# Altium PCB FE.PcbDoc
Units mm, origin at the board's own origin, x right, y up, seen from the top; angles counter-clockwise.
Board outline 43.2 x 52 mm, 4 copper layers (Layer 1, Layer 2, Layer 3, Layer 4), stack 1.641 mm thick; 122 components, 70 nets, 348 pads, 257 vias.
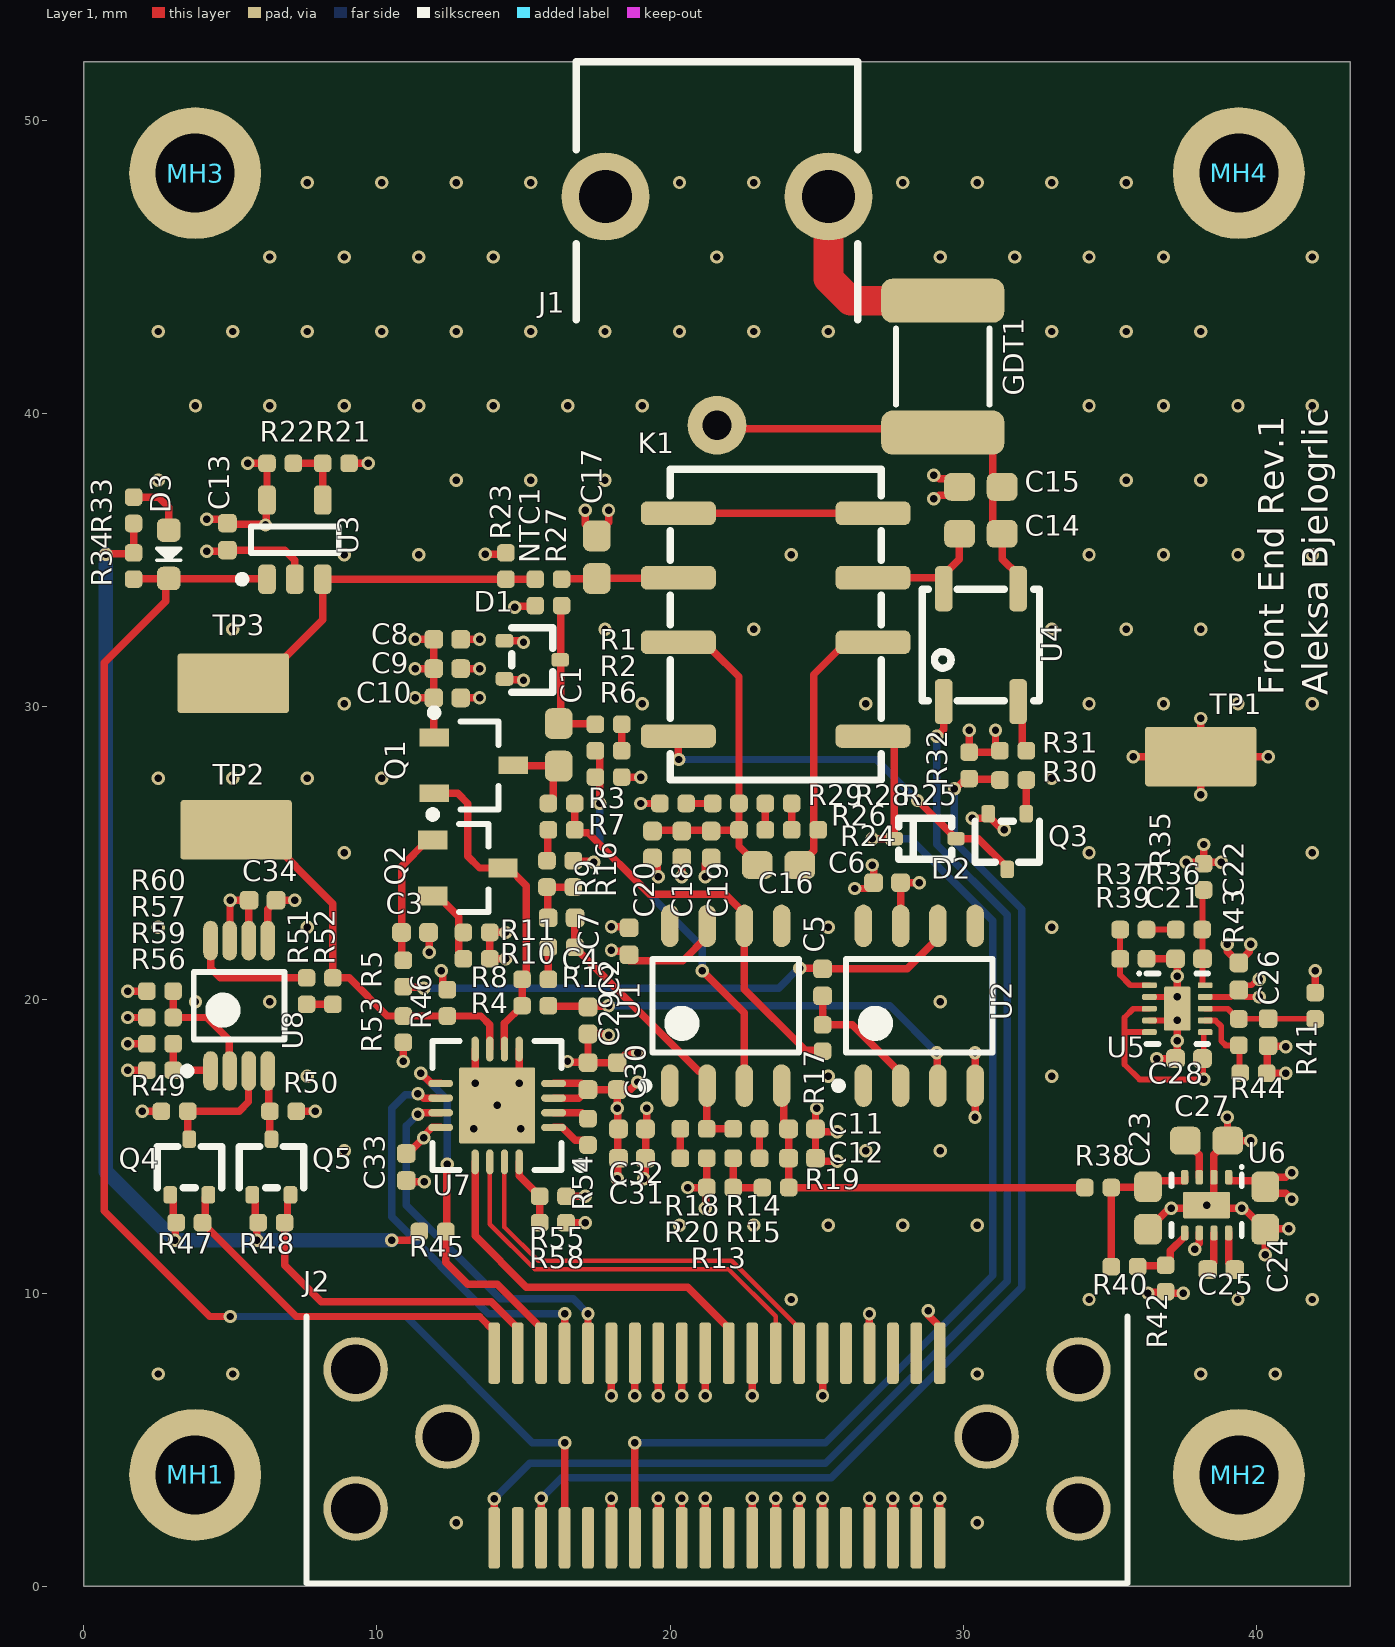
[diagram p0: Layer 1 view]
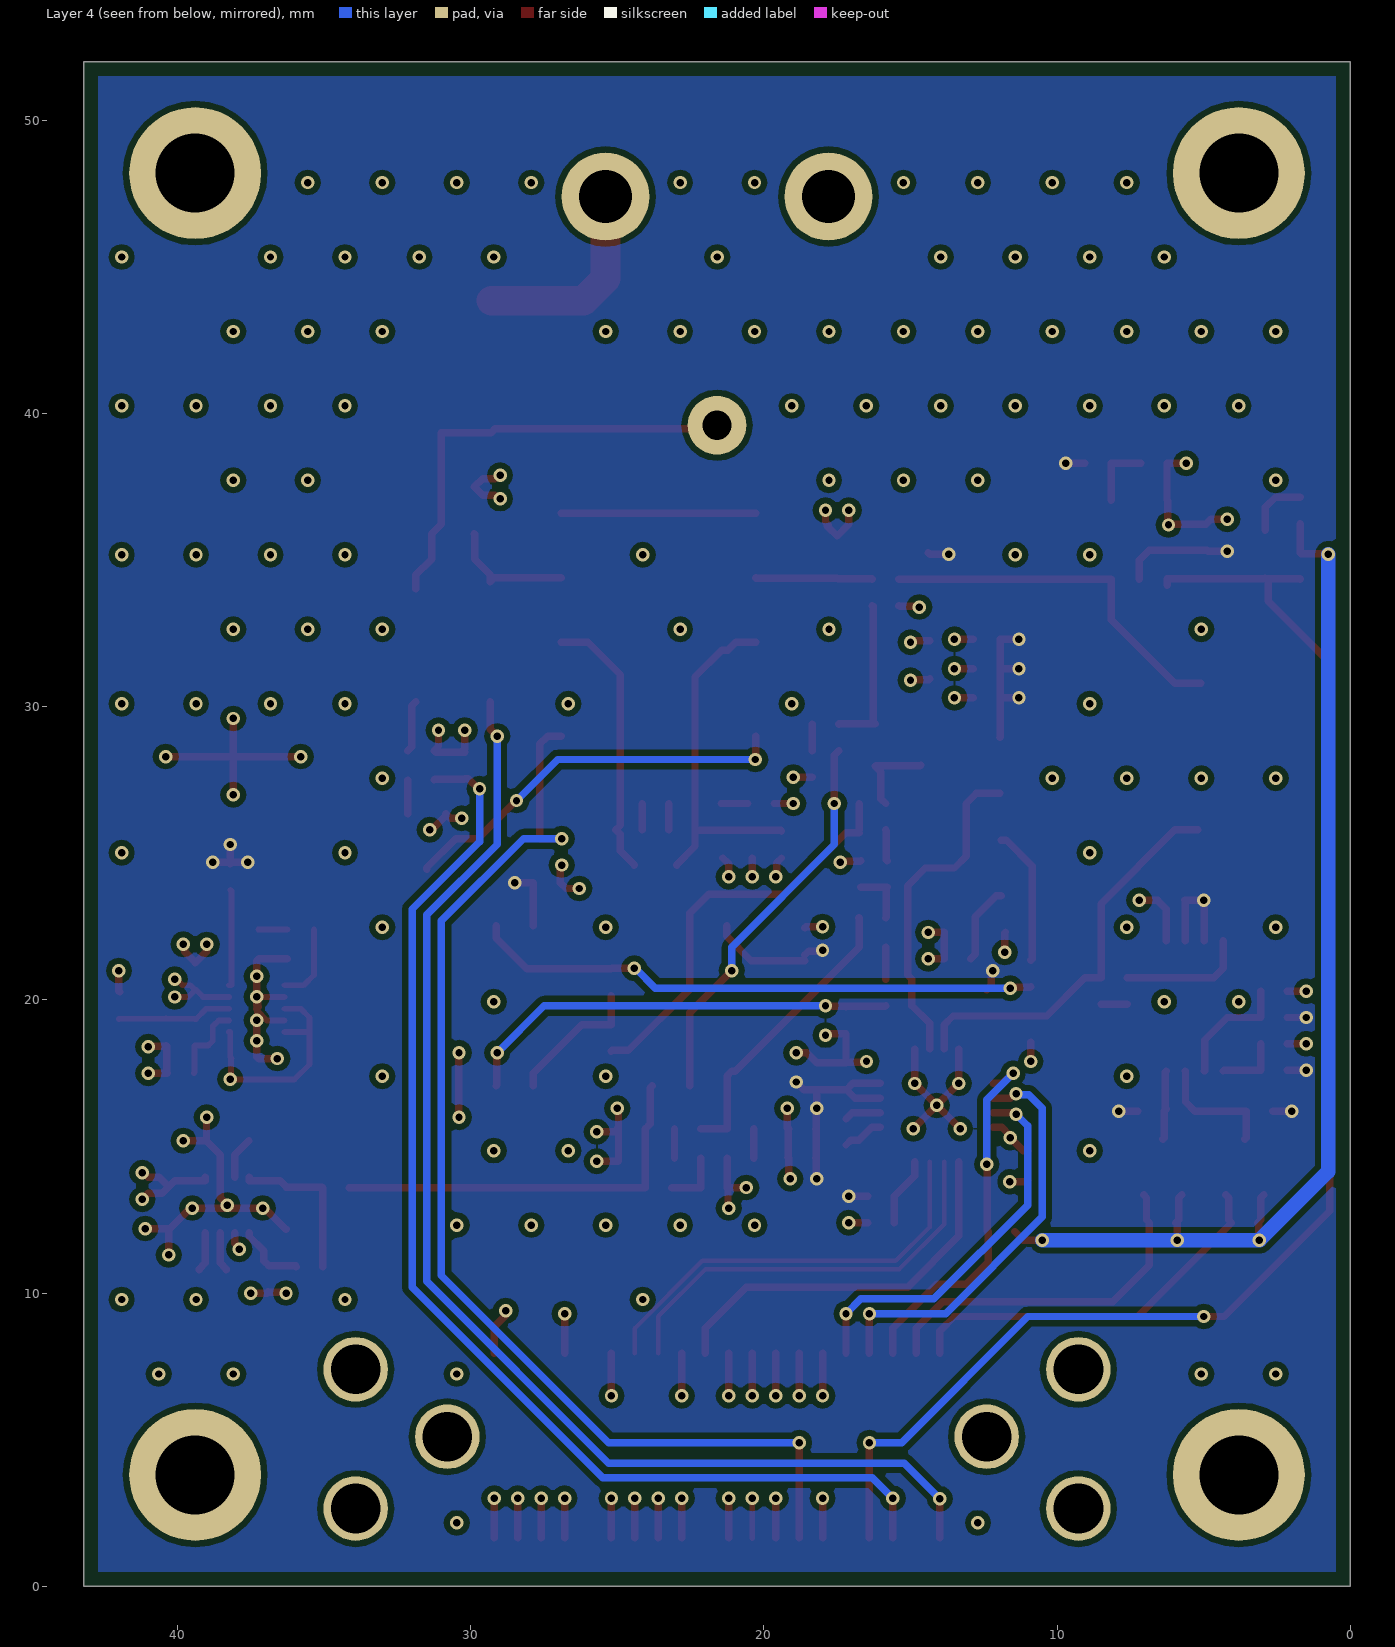
[diagram p1: Layer 4 view, seen from below]
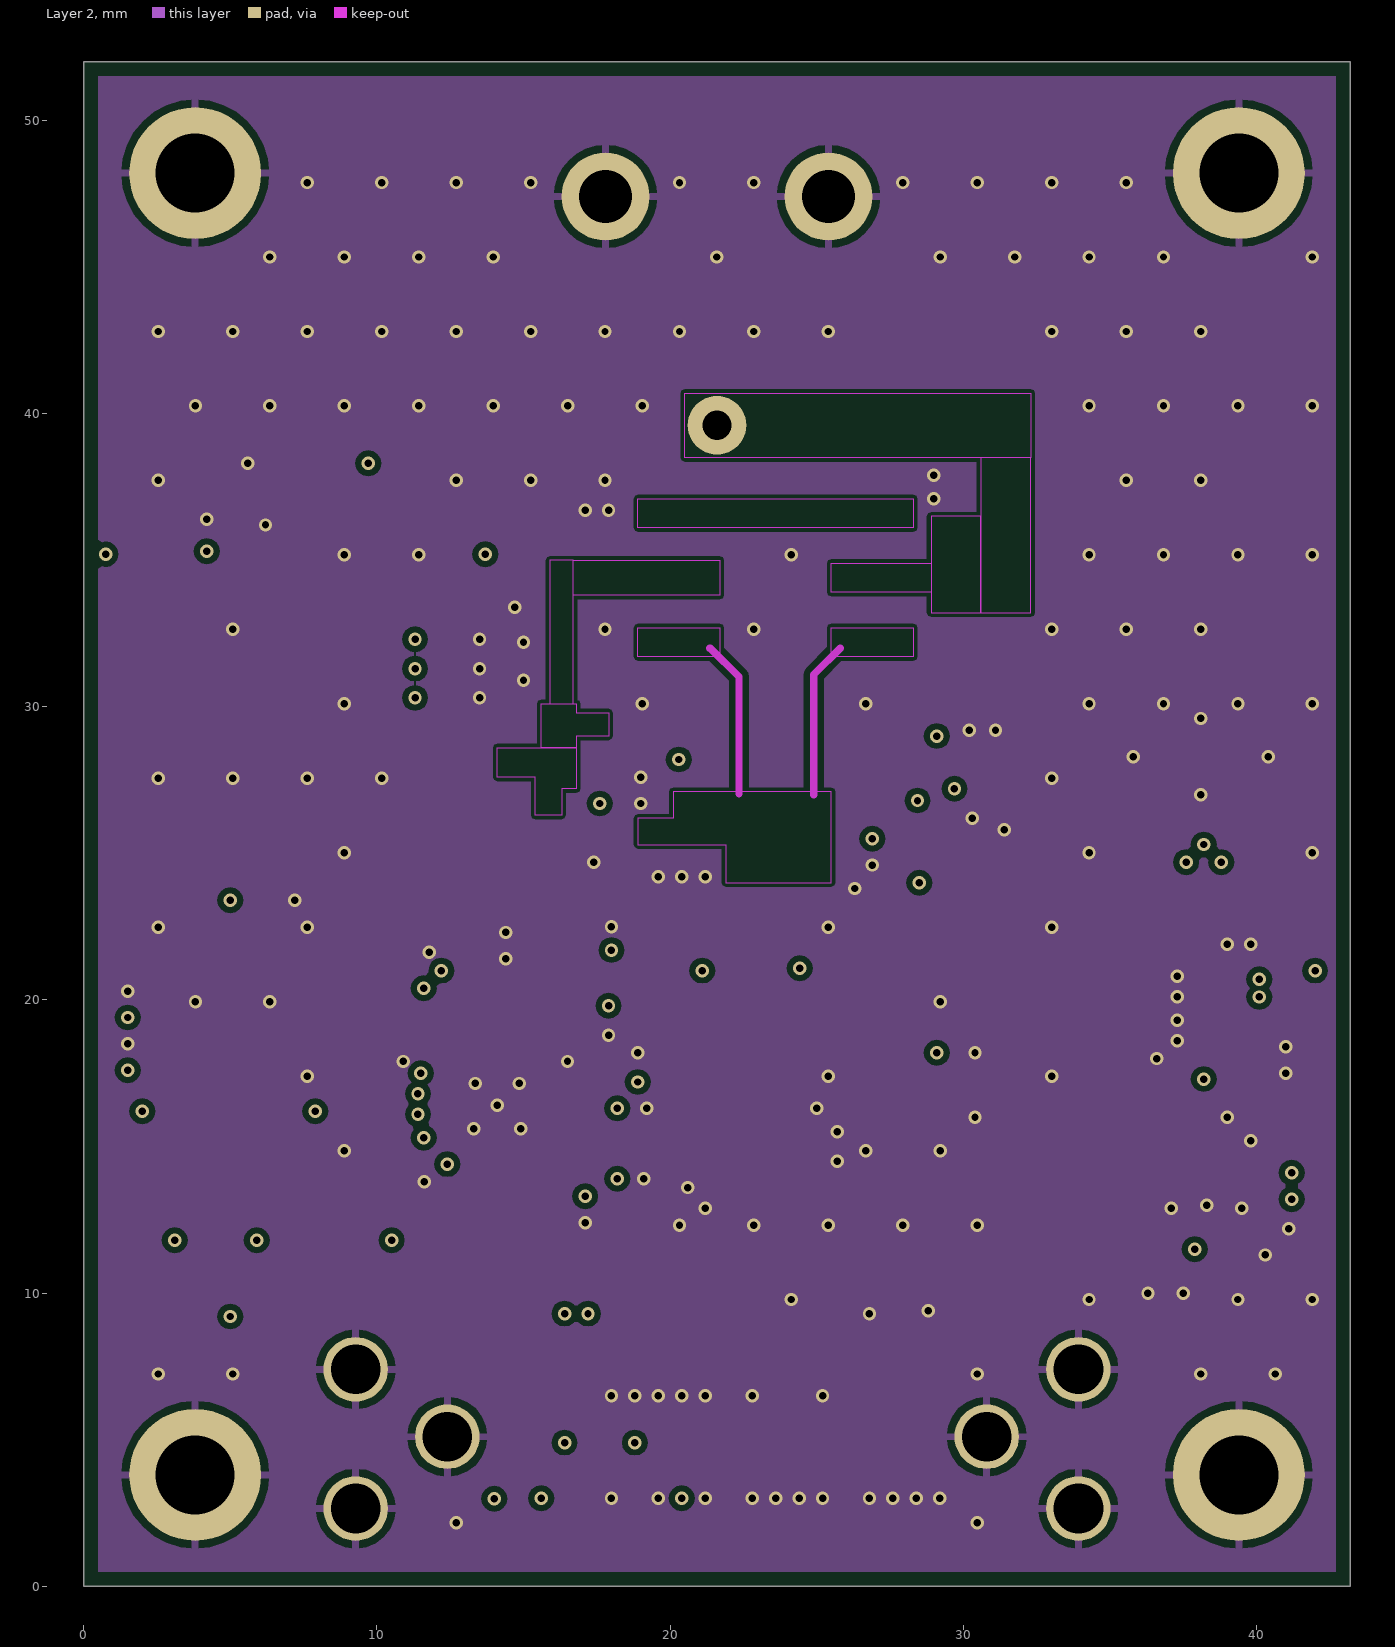
[diagram p2: Layer 2]
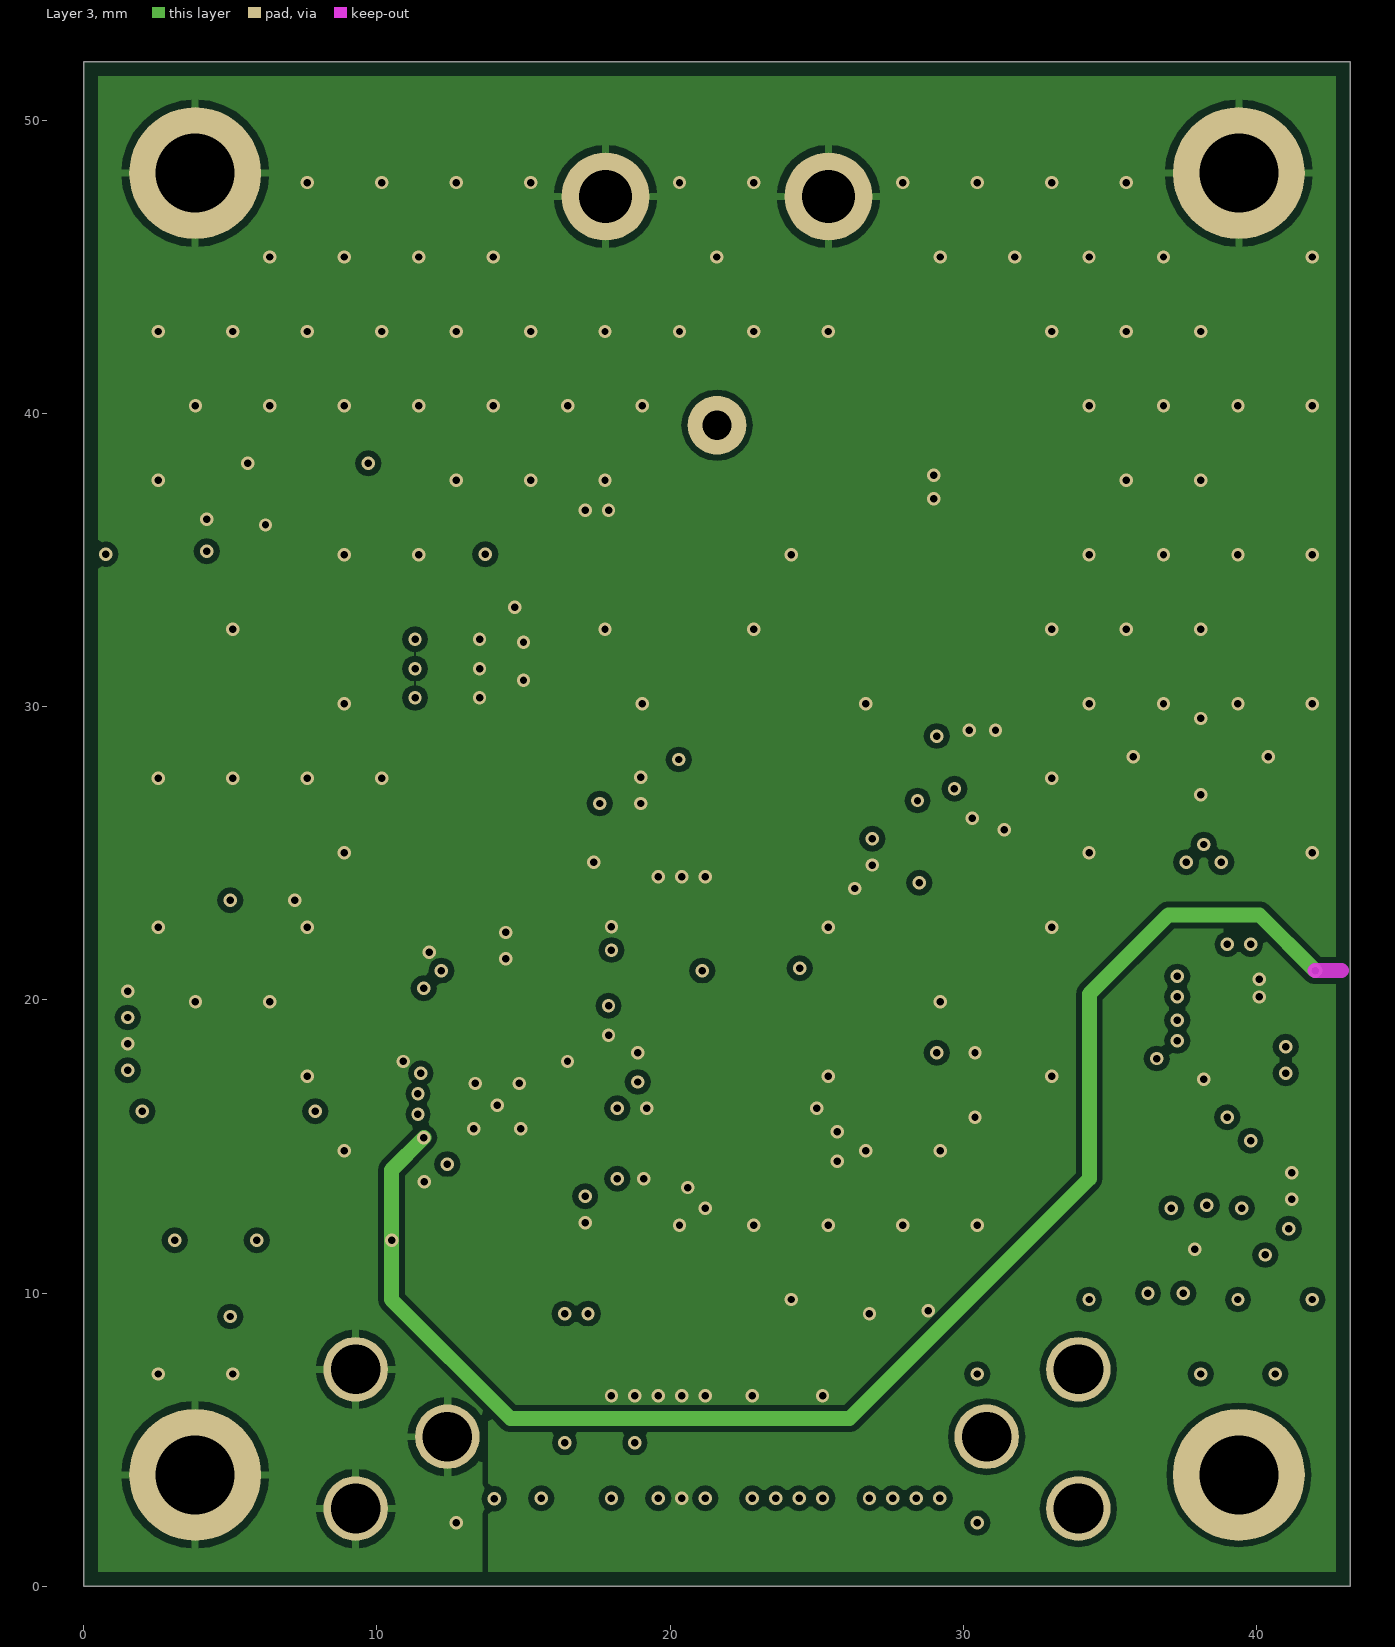
[diagram p3: Layer 3]
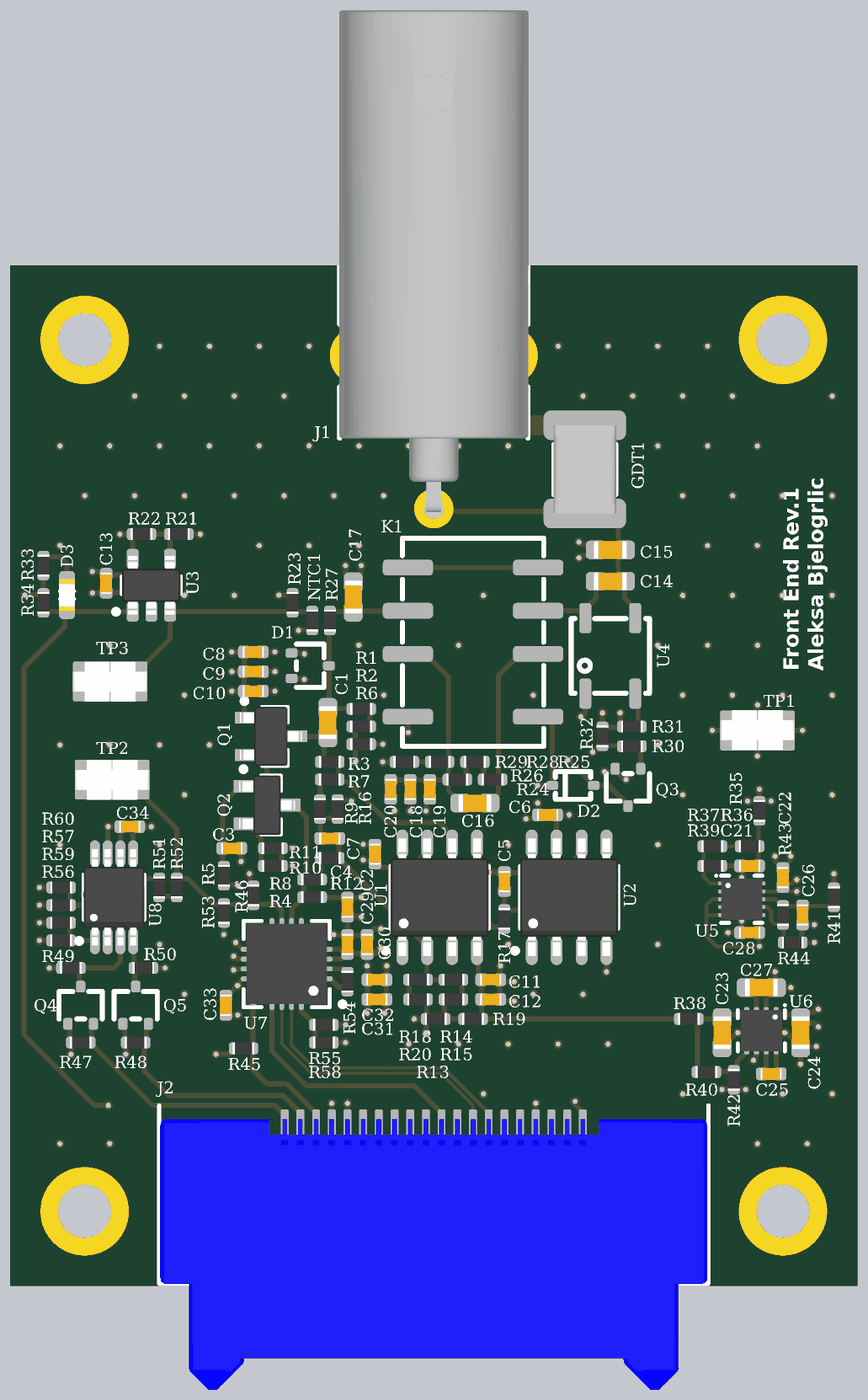
[diagram p4: 3D render of the assembled board from above, using the file's embedded part models]

## Layer stack, top to bottom
Top Solder: solder mask 0.0254, Solder Resist, Dk 3.5
Layer 1: signal copper 0.0356
Dielectric 2: prepreg 0.1702, FR-408, Dk 3.69
Layer 2: signal copper 0.0178
Dielectric 1: dielectric 1.1938, FR-408, Dk 3.69
Layer 3: signal copper 0.0178
Dielectric 3: prepreg 0.1702, FR-408, Dk 3.69
Layer 4: signal copper 0.0356
Bottom Solder: solder mask 0.0254, Solder Resist, Dk 3.5

## Board outline
0,0 43.2,0 43.2,52 0,52

## Design rules (kind name [scope] priority, off if disabled: settings)
Clearance [All] p1: gap=0.127 ignorepadtopadclearanceinfootprint=FALSE except(0.203: Arc-Poly Track-Poly SMDPad-Poly THPad-Poly Via-Poly Fill-Poly Poly-Poly)
HoleSize [All] p1: absolutevalues=TRUE maxlimit=3 minlimit=0.254 maxpercent=80.000 minpercent=20.000
MinimumAnnularRing [All] p1: minimumring=0.102
PolygonConnect [All] p1: thpad.connectstyle=Relief thpad.reliefconductorwidth=0.254 thpad.reliefentries=4 thpad.polygonreliefangle="90 Angle" thpad.airgapwidth=0.254 smdpad.connectstyle=Direct smdpad.reliefconductorwidth=0.254 smdpad.reliefentries=4 smdpad.polygonreliefangle="90 Angle" smdpad.airgapwidth=0.254 via.connectstyle=Direct via.reliefconductorwidth=0.254 via.reliefentries=4 via.polygonreliefangle="90 Angle" via.airgapwidth=0.254
RoutingVias [All] p1: holewidth=0.254 width=0.457 viastyle="Through Hole" minholewidth=0.254 minwidth=0.457 maxholewidth=0.254 maxwidth=0.457 useviatemplates=TRUE viatemplateguid#1={849A4061-242E-4D36-B728-FDEA95E12D9F} viatemplatename#1=v46h25m0mx0
SolderMaskExpansion [All] p1: expansion=0
Width [All] p1: maxlimit=1.016 minlimit=0.127 preferedwidth=0.254
29 further rules are at their usual default settings.

## Classes and differential pairs
component class PGA: C29 C30 C31 C32 C33 C34 Q4 Q5 R45 R46 R47 R48 R49 R50 R51 R52 R53 R54 R55 R56 R57 R58 R59 R60 TP2 U7 U8
component class Main: C21 C22 C23 C24 C25 C26 C27 C28 D3 J1 J2 MH1 MH2 MH3 MH4 R33 R34 R35 R36 R37 R38 R39 R40 R41 R42 R43 R44 TP1 U5 U6
component class "Input Coupling and Attenuation": C13 C14 C15 C16 C17 C18 C19 C20 D1 D2 GDT1 K1 NTC1 Q3 R21 R22 R23 R24 R25 R26 R27 R28 R29 R30 R31 R32 TP3 U3 U4
component class Buffer: C1 C2 C3 C4 C5 C6 C7 C8 C9 C10 C11 C12 Q1 Q2 R1 R2 R3 R4 R5 R6 R7 R8 R9 R10 R11 R12 R13 R14 R15 R16 R17 R18 R19 R20 U1 U2

## Components (designator, comment, footprint, x,y, rotation, side; value= is the part's Value field where it differs from the comment)
C1 "CAP 22nF 100V X7R 0603" GEN_C_0603 16.2,28.7 r90 top value=22nF
C2 "CAP 1uF 25V X5R 0402" GEN_C_0402 17.2,19.3 r90 top value=1uF
C3 "CAP 390pF 50V C0G 0402" GEN_C_0402 11.3,22.3 r180 top value=390pF
C4 "CAP 100nF 16V X7R 0402" GEN_C_0402 16.3,22.8 r0 top value=100nF
C5 "CAP 1uF 25V X5R 0402" GEN_C_0402 25.2,20.6 r90 top value=1uF
C6 "CAP 100nF 16V X7R 0402" GEN_C_0402 27.4,24 r180 top value=100nF
C7 "CAP 100nF 16V X7R 0402" GEN_C_0402 18.6,22 r90 top value=100nF
C8 "CAP 100nF 16V X7R 0402" GEN_C_0402 12.4,32.3 r0 top value=100nF
C9 "CAP 10nF 50V X7R 0402" GEN_C_0402 12.4,31.3 r180 top value=10nF
C10 "CAP 1nF 50V X7R 0402" GEN_C_0402 12.4,30.3 r180 top value=1nF
C11 "CAP 100nF 16V X7R 0402" GEN_C_0402 24.5,15.6 r0 top value=100nF
C12 "CAP 100nF 16V X7R 0402" GEN_C_0402 24.5,14.6 r0 top value=100nF
C13 "CAP 100nF 16V X7R 0402" GEN_C_0402 4.9,35.8 r90 top value=100nF
C14 "CAP 22nF 100V X7R 0603" GEN_C_0603 30.6,35.9 r0 top value=22nF
C15 "CAP 6pF 250V C0G 0603" GEN_C_0603 30.6,37.5 r0 top value=6pF
C16 "CAP 8pF 250V C0G 0603" GEN_C_0603 23.7,24.6 r0 top value=8pF
C17 "CAP 3pF 250V C0G 0603" GEN_C_0603 17.5,35.1 r90 top value=3pF
C18 "CAP 390pF 50V C0G 0402" GEN_C_0402 20.4,25.3 r90 top value=390pF
C19 "CAP 390pF 50V C0G 0402" GEN_C_0402 21.4,25.3 r90 top value=390pF
C20 "CAP DNP 0402" GEN_C_0402 19.4,25.3 r90 top value=DNP
C21 "CAP 2.2uF 10V X5R 0402" GEN_C_0402 37.7,21.4 r0 top value=2.2uF
C22 "CAP 2.2uF 10V X5R 0402" GEN_C_0402 39.4,20.8 r270 top value=2.2uF
C23 "CAP 10uF 10V X5R 0603" GEN_C_0603 36.3,12.9 r90 top value=10uF
C24 "CAP 10uF 10V X5R 0603" GEN_C_0603 40.3,12.9 r90 top value=10uF
C25 "CAP 1uF 25V X5R 0402" GEN_C_0402 38.8,10.8 r0 top value=1uF
C26 "CAP 2.2uF 10V X5R 0402" GEN_C_0402 40.4,18.9 r90 top value=2.2uF
C27 "CAP 10uF 10V X5R 0603" GEN_C_0603 38.3,15.2 r180 top value=10uF
C28 "CAP 2.2uF 10V X5R 0402" GEN_C_0402 37.7,18 r0 top value=2.2uF
C29 "CAP 1nF 50V X7R 0402" GEN_C_0402 17.2,17.4 r270 top value=1nF
C30 "CAP 10nF 50V X7R 0402" GEN_C_0402 18.2,17.4 r270 top value=10nF
C31 "CAP 100nF 16V X7R 0402" GEN_C_0402 18.7,14.6 r180 top value=100nF
C32 "CAP 1uF 25V X5R 0402" GEN_C_0402 18.7,15.6 r180 top value=1uF
C33 "CAP 100nF 16V X7R 0402" GEN_C_0402 11,14.3 r90 top value=100nF
C34 "CAP 100nF 16V X7R 0402" GEN_C_0402 6.1,23.4 r180 top value=100nF
D1 "DIODE ARRAY BAV99W" GEN_SOT_323 15.3,31.6 r270 top
D2 "DIODE 1N4148" GEN_SOD_323 28.7,25.5 r0 top
D3 "RED" LED_0603_APT1608 2.9,35.2 r90 top
GDT1 "GDT 90V" BOU_2051 29.3,41.6 r90 top
J1 "BNC JACK R/A" MOL_0731000105 21.6,43.5 r0 top
J2 "FX18-40P-0.8SH" HIR_FX18-40P-0.8SH 21.6,4.8 r0 top
K1 "RELAY DPDT-NO FTR-B3GA" FUJ_FTR-B3GA 23.6,32.8 r90 top
MH1 "M2.5" "MH M2.5" 3.8,3.8 r0 top
MH2 "M2.5" "MH M2.5" 39.4,3.8 r0 top
MH3 "M2.5" "MH M2.5" 3.8,48.2 r0 top
MH4 "M2.5" "MH M2.5" 39.4,48.2 r0 top
NTC1 "NTC 10K 3900K 0402" GEN_R_0402 15.4,33.9 r270 top value=10K
Q1 "NJFET CPH3910" ON_SOT23_CPH3 13.3,28 r0 top
Q2 "NPN MMBT3904" MMC_SOT23 13.1,24.5 r0 top
Q3 "NMOS DMN62D0UW" GEN_SOT_323 31.5,25.4 r180 top
Q4 "NMOS DMN62D0UW" GEN_SOT_323 3.6,14.3 r0 top
Q5 "NMOS DMN62D0UW" GEN_SOT_323 6.4,14.3 r0 top
R1 "RES 390K OHM 1% 1/10W 0402" GEN_R_0402 17.9,29.4 r0 top value=390K
R2 "RES 510K OHM 1% 1/10W 0402" GEN_R_0402 17.9,28.5 r180 top value=510K
R3 "RES 1M OHM 1% 1/10W 0402" GEN_R_0402 16.3,26.7 r180 top value=1M
R4 "RES 1M OHM 1% 1/10W 0402" GEN_R_0402 15.4,19.8 r0 top value=1M
R5 "RES 3K OHM 1% 1/10W 0402" GEN_R_0402 10.9,20.9 r90 top value=3K
R6 "RES 100K OHM 1% 1/10W 0402" GEN_R_0402 17.9,27.6 r0 top value=100k
R7 "RES 390K OHM 1% 1/10W 0402" GEN_R_0402 16.3,25.8 r180 top value=390K
R8 "RES 390K OHM 1% 1/10W 0402" GEN_R_0402 15.4,20.7 r0 top value=390K
R9 "RES 510K OHM 1% 1/10W 0402" GEN_R_0402 15.8,24.3 r270 top value=510K
R10 "RES 100 OHM 1% 1/10W 0402" GEN_R_0402 13.4,21.4 r180 top value=100
R11 "RES 100 OHM 1% 1/10W 0402" GEN_R_0402 13.4,22.3 r180 top value=100
R12 "RES 510K OHM 1% 1/10W 0402" GEN_R_0402 16.3,21.8 r0 top value=510K
R13 "RES 1K OHM 1% 1/10W 0402" GEN_R_0402 21.7,13.6 r0 top value=1K
R14 "RES 390K OHM 1% 1/10W 0402" GEN_R_0402 22.6,15.6 r0 top value=390K
R15 "RES 510K OHM 1% 1/10W 0402" GEN_R_0402 22.6,14.6 r180 top value=510K
R16 "RES 100K OHM 1% 1/10W 0402" GEN_R_0402 16.7,24.3 r90 top value=100k
R17 "RES 1M OHM 1% 1/10W 0402" GEN_R_0402 25.2,18.7 r90 top value=1M
R18 "RES 100K OHM 1% 1/10W 0402" GEN_R_0402 20.8,15.6 r180 top value=100k
R19 "RES 1K OHM 1% 1/10W 0402" GEN_R_0402 23.6,13.6 r0 top value=1K
R20 "RES 15K OHM 1% 1/10W 0402" GEN_R_0402 20.8,14.6 r180 top value=15K
R21 "RES 390K OHM 1% 1/10W 0402" GEN_R_0402 8.6,38.3 r180 top value=390K
R22 "RES 100K OHM 1% 1/10W 0402" GEN_R_0402 6.7,38.3 r180 top value=100k
R23 "RES 10K OHM 1% 1/10W 0402" GEN_R_0402 14.4,34.8 r90 top value=10K
R24 "RES 300K OHM 1% 1/10W 0402" GEN_R_0402 24.6,25.8 r180 top value=300K
R25 "RES 300K OHM 1% 1/10W 0402" GEN_R_0402 23.7,26.7 r180 top value=300K
R26 "RES 390K OHM 1% 1/10W 0402" GEN_R_0402 22.8,25.8 r180 top value=390K
R27 "RES 100 OHM 1% 1/10W 0402" GEN_R_0402 16.3,33.9 r90 top value=100
R28 "RES 100 OHM 1% 1/10W 0402" GEN_R_0402 21.9,26.7 r0 top value=100
R29 "RES 10K OHM 1% 1/10W 0402" GEN_R_0402 20.1,26.7 r0 top value=10K
R30 "RES 1K OHM 1% 1/10W 0402" GEN_R_0402 31.7,27.5 r180 top value=1K
R31 "RES 1K OHM 1% 1/10W 0402" GEN_R_0402 31.7,28.5 r0 top value=1K
R32 "RES 10K OHM 1% 1/10W 0402" GEN_R_0402 30.2,28 r270 top value=10K
R33 "RES 1K OHM 1% 1/10W 0402" GEN_R_0402 1.7,36.7 r90 top value=1K
R34 "RES 10K OHM 1% 1/10W 0402" GEN_R_0402 1.7,34.8 r90 top value=10K
R35 "0.1" GEN_R_0402 38.2,24.2 r90 top
R36 "RES 300K OHM 1% 1/10W 0402" GEN_R_0402 37.7,22.4 r0 top value=300K
R37 "RES 510K OHM 1% 1/10W 0402" GEN_R_0402 35.8,22.4 r180 top value=510K
R38 "0.1" GEN_R_0402 34.6,13.6 r180 top
R39 "RES 100K OHM 1% 1/10W 0402" GEN_R_0402 35.8,21.4 r180 top value=100k
R40 "RES 300K OHM 1% 1/10W 0402" GEN_R_0402 35.5,10.9 r180 top value=300K
R41 "0.1" GEN_R_0402 42,19.8 r90 top
R42 "RES 100K OHM 1% 1/10W 0402" GEN_R_0402 36.9,10.5 r90 top value=100k
R43 "RES 510K OHM 1% 1/10W 0402" GEN_R_0402 39.4,18.9 r90 top value=510K
R44 "RES 100K OHM 1% 1/10W 0402" GEN_R_0402 39.9,17.5 r180 top value=100k
R45 "RES 10K OHM 1% 1/10W 0402" GEN_R_0402 11.9,12.1 r180 top value=10K
R46 "RES 100 OHM 1% 1/10W 0402" GEN_R_0402 12.4,19.9 r90 top value=100
R47 "RES 10K OHM 1% 1/10W 0402" GEN_R_0402 3.6,12.4 r180 top value=10K
R48 "RES 10K OHM 1% 1/10W 0402" GEN_R_0402 6.4,12.4 r180 top value=10K
R49 "RES 10K OHM 1% 1/10W 0402" GEN_R_0402 3.1,16.2 r180 top value=10K
R50 "RES 10K OHM 1% 1/10W 0402" GEN_R_0402 6.8,16.2 r0 top value=10K
R51 "RES 100 OHM 1% 1/10W 0402" GEN_R_0402 7.6,20.3 r90 top value=100
R52 "RES 100 OHM 1% 1/10W 0402" GEN_R_0402 8.5,20.3 r270 top value=100
R53 "RES 100 OHM 1% 1/10W 0402" GEN_R_0402 10.9,19 r90 top value=100
R54 "RES 100 OHM 1% 1/10W 0402" GEN_R_0402 17.2,15.5 r90 top value=100
R55 "RES 10K OHM 1% 1/10W 0402" GEN_R_0402 16,13.3 r0 top value=10K
R56 "RES 10K OHM 1% 1/10W 0402" GEN_R_0402 2.6,17.6 r180 top value=10K
R57 "RES 10K OHM 1% 1/10W 0402" GEN_R_0402 2.6,19.4 r180 top value=10K
R58 "RES 10K OHM 1% 1/10W 0402" GEN_R_0402 16,12.4 r180 top value=10K
R59 "RES 10K OHM 1% 1/10W 0402" GEN_R_0402 2.6,18.5 r0 top value=10K
R60 "RES 10K OHM 1% 1/10W 0402" GEN_R_0402 2.6,20.3 r0 top value=10K
TP1 "5019" KEY_5019 38.1,28.3 r0 top
TP2 "5019" KEY_5019 5.2,25.8 r180 top
TP3 "5019" KEY_5019 5.1,30.8 r180 top
U1 "OP07CDR" TI_SOIC8_D0008A 21.9,19.8 r90 top
U2 "OP07CDR" TI_SOIC8_D0008A 28.5,19.8 r90 top
U3 "MIC7221" GEN_SOT23_5_950_2900X1600X1450 7.2,35.7 r90 top
U4 "SSR CPC1017NTR" IXY_CPC1017 30.6,32.1 r0 top
U5 "TLV75201" TI_WSON10_DSQ0010A 37.3,19.7 r0 top
U6 "LM27761" TI_WSON8_DSG0008A 38.3,13 r270 top
U7 "LMH6518" TI_WQFN_RGH0016A 14.1,16.4 r180 top
U8 "IC DAC DAC101C085" TI_VSSOP8_DGK 5.3,19.8 r90 top

## Footprints (in the part's own frame and the unit in brackets; to place one, negate y for a bottom-side part, rotate by r counter-clockwise, add the part's x,y. Pads: shape width x height; smd on the part's side, far side on the other; paste and mask are expansions set on the pad)
BOU_2051 [mm]
  rrect50% 1.5x4.2 smd: 1(-2.25,0) 2(2.25,0)
  silkscreen extent -1.3,-1.6 1.3,1.6, body extent -2.25,-1.6 2.25,1.6, height 2.7
FUJ_FTR-B3GA [mm]
  rrect50% 0.8x2.56 smd: 1(-3.8,-3.32) 2(-0.6,-3.32) 3(1.6,-3.32) 4(3.8,-3.32) 5(3.8,3.32) 6(1.6,3.32) 7(-0.6,3.32) 8(-3.8,3.32)
  silkscreen extent -5.3,-3.6 5.3,3.6, body extent -5.43,-3.73 5.43,3.73, height 5.45
GEN_C_0402 [mm] "Chip Capacitor, 0402, IPC Medium Density"
  rrect50% 0.64x0.64 smd: 1(-0.46,0) 2(0.46,0)
  body extent -0.55,-0.3 0.55,0.3, height 0.6
GEN_C_0603 [mm] "Chip Capacitor, 2-Leads, Body 1.60x0.80mm, IPC Medium Density"
  rrect50% 1.05x0.95 smd: 1(-0.725,0) 2(0.725,0)
  body extent -0.85,-0.45 0.85,0.45, height 0.9
GEN_R_0402 [mm] "Chip Resistor, 2-Leads, Body 1.00x0.50mm, IPC Medium Density"
  rrect50% 0.6x0.6 smd: 1(-0.45,0) 2(0.45,0)
  body extent -0.55,-0.3 0.55,0.3, height 0.4
GEN_SOD_323 [mm]
  rrect50% 0.59x0.45 smd: 1(-1.055,0) 2(1.055,0)
  silkscreen extent -0.9,-0.7 0.9,0.7, body extent -1.03,-0.83 1.03,0.83, height 1.1
GEN_SOT23_5_950_2900X1600X1450 [mm] "SOT23, 5-Leads, Body 2.90x2.80mm, Pitch 0.95mm, IPC Medium Density"
  rrect50% 1x0.6 smd: 1(-1.35,0.95) 2(-1.35,0) 3(-1.35,-0.95) 4(1.35,-0.95) 5(1.35,0.95)
  silkscreen extent -1.47,-1.5 0.45,1.92, body extent -1.5,-1.5 1.5,1.5, height 1.45
GEN_SOT_323 [mm]
  rrect50% 0.47x0.6 smd: 1(0,0.95) 2(-0.65,-0.95) 3(0.65,-0.95)
  silkscreen extent -1.1,-0.7 1.1,0.7, body extent -1.23,-0.83 1.23,0.83, height 1.1
HIR_FX18-40P-0.8SH [mm]
  rrect50% 0.4x2.1 smd: 1(7.6,3.15) 2(6.8,3.15) 3(6,3.15) 4(5.2,3.15) 5(4.4,3.15) 6(3.6,3.15) 7(2.8,3.15) 8(2,3.15) 9(1.2,3.15) 10(0.4,3.15) 11(-0.4,3.15) 12(-1.2,3.15) 13(-2,3.15) 14(-2.8,3.15) 15(-3.6,3.15) 16(-4.4,3.15) 17(-5.2,3.15) 18(-6,3.15) 19(-6.8,3.15) 20(-7.6,3.15) 21(-7.6,-3.15) 22(-6.8,-3.15) 23(-6,-3.15) 24(-5.2,-3.15) 25(-4.4,-3.15) 26(-3.6,-3.15) 27(-2.8,-3.15) 28(-2,-3.15) 29(-1.2,-3.15) 30(-0.4,-3.15) 31(0.4,-3.15) 32(1.2,-3.15) 33(2,-3.15) 34(2.8,-3.15) 35(3.6,-3.15) 36(4.4,-3.15) 37(5.2,-3.15) 38(6,-3.15) 39(6.8,-3.15) 40(7.6,-3.15)
  round 2.2 hole 1.7: SHLD(-12.325,-2.15) SHLD(-12.325,2.6) SHLD(-9.2,0.3) SHLD(9.2,0.3) SHLD(12.325,-2.15) SHLD(12.325,2.6)
  silkscreen extent -14,-4.7 14,4.4, body extent -13.95,-10.1 13.95,3.7, height 9.48
IXY_CPC1017 [mm]
  rrect50% 0.6x1.54 smd: 1(-1.27,-1.925) 2(1.27,-1.925) 3(1.27,1.925) 4(-1.27,1.925)
  silkscreen extent -2,-1.9 2,1.9, body extent -2.13,-2.03 2.13,2.03, height 2
KEY_5019 [mm] "PC TEST POINT MINIATURE"
  rrect10% 3.8x2.03 smd: 1(0,0)
  body extent -1.91,-1 1.91,1.03, height 2.29
LED_0603_APT1608 [mm]
  rrect50% 0.8x0.8 smd: 1(-0.825,0) 2(0.825,0)
  silkscreen extent -0.2,-0.4 0.2,0.4, body extent -0.81,-0.4 0.81,0.4, height 0.74
"MH M2.5" [mm]
  round 4.5 hole 2.7: 1(0,0)
MMC_SOT23 [mm] "SOT23, 3-Leads, Body 2.92x2.37mm, Pitch 0.95mm, Height 1.12mm, IPC Medium Density"
  rect 1x0.65 smd: 1(-1.2,0.95) 2(-1.2,-0.95) 3(1.2,0)
  silkscreen extent -1.32,-1.5 0.7,1.95, body extent -1.42,-1.52 1.42,1.52, height 1.12
MOL_0731000105 [mm] "Molex BNC Jack, TH Right Angle"
  round 2 hole 1: 1(0,-3.9)
  round 3 hole 1.8: 2(-3.8,3.9) 2(3.8,3.9)
  silkscreen extent -4.8,-0.3 4.8,8.5, body extent -4.83,-4.08 4.83,21.47, height 9.14
ON_SOT23_CPH3 [mm] "SOT23, 3-Leads, Body 2.90x2.80mm, Pitch 0.95mm, Height 0.95mm, IPC Medium Density"
  rect 1x0.6 smd: 1(-1.35,0.95) 2(-1.35,-0.95) 3(1.35,0)
  silkscreen extent -1.47,-1.5 0.85,1.92, body extent -1.58,-1.5 1.58,1.5, height 0.95
TI_SOIC8_D0008A [mm] "SOIC, 8-Leads, Body 4.91x3.90mm, Pitch 1.27mm, Height 1.75mm, IPC Medium Density"
  oval 1.45x0.6 smd: 1(-2.725,1.905) 2(-2.725,0.635) 3(-2.725,-0.635) 4(-2.725,-1.905) 5(2.725,-1.905) 6(2.725,-0.635) 7(2.725,0.635) 8(2.725,1.905)
  silkscreen extent -2.85,-2.5 1.6,2.88, body extent -3,-2.5 3,2.5, height 1.75
TI_VSSOP8_DGK [mm] "TSOP, 8-Leads, Body 3.00x3.00mm, Pitch 0.65mm, IPC Medium Density"
  oval 1.35x0.5 smd: 1(-2.225,0.975) 2(-2.225,0.325) 3(-2.225,-0.325) 4(-2.225,-0.975) 5(2.225,-0.975) 6(2.225,-0.325) 7(2.225,0.325) 8(2.225,0.975)
  silkscreen extent -2.35,-1.55 1.15,1.9, body extent -2.45,-1.55 2.45,1.55, height 1.1
TI_WQFN_RGH0016A [mm] "QFN, 16-Leads, Body 4.00x4.00mm, Pitch 0.50mm, Thermal Pad 2.60x2.60mm, IPC Medium Density"
  oval 0.85x0.25 smd: 1(-1.925,0.75) 2(-1.925,0.25) 3(-1.925,-0.25) 4(-1.925,-0.75) 9(1.925,-0.75) 10(1.925,-0.25) 11(1.925,0.25) 12(1.925,0.75)
  oval 0.25x0.85 smd: 5(-0.75,-1.925) 6(-0.25,-1.925) 7(0.25,-1.925) 8(0.75,-1.925) 13(0.75,1.925) 14(0.25,1.925) 15(-0.25,1.925) 16(-0.75,1.925)
  rrect5% 2.6x2.6 smd paste-1.3: 17(0,0)
  silkscreen extent -2.98,-2.2 2.2,2.2, body extent -2.05,-2.05 2.05,2.05, height 0.8
TI_WSON8_DSG0008A [mm] "SON, 8-Leads, Body 2.00x2.00mm, Pitch 0.50mm, Thermal Pad 1.60x0.69mm, IPC Medium Density"
  rrect50% 0.5x0.25 smd: 1(-0.95,0.75) 2(-0.95,0.25) 3(-0.95,-0.25) 4(-0.95,-0.75) 5(0.95,-0.75) 6(0.95,-0.25) 7(0.95,0.25) 8(0.95,0.75)
  rrect10% 0.9x1.6 smd paste-0.9: 9(0,0)
  silkscreen extent -1.35,-1.2 1.05,1.25, body extent -1.05,-1.05 1.05,1.05, height 0.8
TI_WSON10_DSQ0010A [mm] "SON, 10-Leads, Body 2.00x2.00mm, Pitch 0.40mm, Thermal Pad 1.50x0.69mm, IPC Medium Density"
  rrect50% 0.5x0.2 smd: 1(-0.95,0.8) 2(-0.95,0.4) 3(-0.95,0) 4(-0.95,-0.4) 5(-0.95,-0.8) 6(0.95,-0.8) 7(0.95,-0.4) 8(0.95,0) 9(0.95,0.4) 10(0.95,0.8)
  rrect10% 0.9x1.5 smd: 11(0,0)
  silkscreen extent -1.35,-1.2 1.05,1.25, body extent -1.05,-1.05 1.05,1.05, height 0.8

## Part data
C1 C14: Package=0603, Supplier Part Number 1=490-4782-1-ND, Voltage Rating=100V, Supplier 1=Digi-Key
C2 C5 C25 C32: Package=0402, Supplier Part Number 1=490-10017-1-ND, Voltage Rating=25V, Supplier 1=Digi-Key
C3 C18 C19: Package=0402, Supplier Part Number 1=490-8202-1-ND, Voltage Rating=50V, Supplier 1=Digi-Key
C4 C6 C7 C8 C11 C12 C13 C31 C33 C34: Package=0402, Supplier Part Number 1=490-4759-1-ND, Voltage Rating=16V, Supplier 1=Digi-Key
C9 C30: Package=0402, Supplier Part Number 1=490-4762-1-ND, Voltage Rating=50V, Supplier 1=Digi-Key
C10 C29: Package=0402, Supplier Part Number 1=490-4761-1-ND, Voltage Rating=50V, Supplier 1=Digi-Key
C15: Package=0603, Supplier Part Number 1=399-8734-1-ND, Voltage Rating=250V, Supplier 1=Digi-Key
C16: Package=0603, Supplier Part Number 1=399-8740-1-ND, Voltage Rating=250V, Supplier 1=Digi-Key
C17: Package=0603, Supplier Part Number 1=399-8820-1-ND, Voltage Rating=250V, Supplier 1=Digi-Key
C20: Package=0402
C21 C22 C26 C28: Package=0402, Supplier Part Number 1=490-10451-1-ND, Voltage Rating=10V, Supplier 1=Digi-Key
C23 C24 C27: Package=0402, Supplier Part Number 1=490-10474-1-ND, Voltage Rating=10V, Supplier 1=Digi-Key
D1: Supplier Part Number 1=BAV99W-FDICT-ND, Supplier 1=Digi-Key
D2: Max Current=150mA, Max Reverse Voltage=75V, Supplier Part Number 1=1N4148WS-FDICT-ND, Supplier 1=Digi-Key
D3: library part "LED RED 0603 APT1608", Supplier Part Number 1=754-1930-1-ND, Supplier 1=Digi-Key
GDT1: Supplier Part Number 1=2051-09-SM-RPLFCT-ND, Supplier 1=Digi-Key
J1: Supplier Part Number 1=WM5524-ND, Supplier 1=Digi-Key
J2: library part "CONN HDR FX18-40P-0.8SH", Supplier Part Number 1=H11868-ND, Supplier 1=Digi-Key
MH1 MH2 MH3 MH4: library part "MH M2.5"
NTC1: B Value=3900k, Package=0402, Supplier Part Number 1=P12985CT-ND, Supplier 1=Digi-Key
Q1: Supplier Part Number 1=CPH3910-TL-EOSCT-ND, Supplier 1=Digi-Key
Q2: Supplier Part Number 1=MMBT3904TPMSCT-ND, Supplier 1=Digi-Key
Q3 Q4 Q5: Max Power=320mW, Supplier Part Number 1=DMN62D0UW-7DICT-ND, Id=340mA, Supplier 1=Digi-Key, Vdss=60V
R1 R7 R8 R14 R21 R26: Package=0402, Power Rating=0.1W, Supplier Part Number 1=P390KLCT-ND, Tolerance=1%, Supplier 1=Digi-Key
R2 R9 R12 R15 R37 R43: Package=0402, Power Rating=0.1W, Supplier Part Number 1=P510KLCT-ND, Tolerance=1%, Supplier 1=Digi-Key
R3 R4 R17: Package=0402, Power Rating=0.1W, Supplier Part Number 1=P1.00MLCT-ND, Tolerance=1%, Supplier 1=Digi-Key
R5: Package=0402, Power Rating=0.1W, Supplier Part Number 1=P3.00KLCT-ND, Tolerance=1%, Supplier 1=Digi-Key
R6 R16 R18 R22 R39 R42 R44: Package=0402, Power Rating=0.1W, Supplier Part Number 1=P100KLCT-ND, Tolerance=1%, Supplier 1=Digi-Key
R10 R11 R27 R28 R46 R51 R52 R53 R54: Package=0402, Power Rating=0.1W, Supplier Part Number 1=P100LCT-ND, Tolerance=1%, Supplier 1=Digi-Key
R13 R19 R30 R31 R33: Package=0402, Power Rating=0.1W, Supplier Part Number 1=P1.00KLCT-ND, Tolerance=1%, Supplier 1=Digi-Key
R20: Package=0402, Power Rating=0.1W, Supplier Part Number 1=P15.0KLCT-ND, Tolerance=1%, Supplier 1=Digi-Key
R23 R29 R32 R34 R45 R47 R48 R49 R50 R55 R56 R57 R58 R59 R60: Package=0402, Power Rating=0.1W, Supplier Part Number 1=P10.0KLCT-ND, Tolerance=1%, Supplier 1=Digi-Key
R24 R25 R36 R40: Package=0402, Power Rating=0.1W, Supplier Part Number 1=P300KLCT-ND, Tolerance=1%, Supplier 1=Digi-Key
R35 R38 R41: library part "RES 0.1 OHM 1% 1/6W 0402", Package=0402, Power Rating=0.16W, Supplier Part Number 1=P.10AKCT-ND, Tolerance=1%, Supplier 1=Digi-Key
TP1 TP2 TP3: library part "TP KEYSTONE 5019", Supplier Part Number 1=36-5019CT-ND, Supplier 1=Digi-Key
U1 U2: library part "IC OPAMP OP07CDR", Supplier Part Number 1=296-14626-1-ND, Supplier 1=Digi-Key
U3: library part "IC COMP MIC7221YM5", Supplier Part Number 1=576-2901-1-ND, Supplier 1=Digi-Key
U4: Supplier Part Number 1=CLA233CT-ND, Supplier 1=Digi-Key
U5: library part "IC LDO TLV75201", Supplier Part Number 1=296-TLV75201PDSQRCT-ND, Supplier 1=Digi-Key
U6: library part "IC CPUMP LM27761", Supplier Part Number 1=296-44379-1-ND, Supplier 1=Digi-Key
U7: library part "IC PGA LMH6518", Supplier Part Number 1=LMH6518SQE/NOPBCT-ND, Supplier 1=Digi-Key
U8: Supplier Part Number 1=DAC101C085CIMM/NOPBCT-ND, Supplier 1=Digi-Key

## Via types
v1: diameter 0.457, hole 0.254, Layer 1 to Layer 4, tented both sides, 257 vias

## Nets (pads, with @x,y where several pads share a name; then routed paths per layer and width w, separated by ;. In a path a pad name is that pad's centre, name@x,y a point inside that pad or via, vN(x,y) a via of type N, cw(c..) or ccw(c..) an arc to the next point about the centre after c; other vN are vias at no path point)
0dB_EN: J2.23 R30.2 R32.2 | length 40.4
  Layer 1 w0.254: J2.23 v1(15.6,3) ; v1(29.7,27.2) 29.734,27.2 30.084,27.55 R32.2 30.225,27.525 31.225,27.525 R30.2
  Layer 4 w0.254: v1(15.6,3) 16.3,3.7 25.5,3.7 32,10.2 32,23.1 29.7,25.4 v1(29.7,27.2)
+3V3: C33.2 Q4.2 Q5.2 R33.1 R34.2 R41.2 R45.2 R47.2 R48.2 U7.12 | length 91.2
  Layer 1 w0.254: v1(0.75,35.2) 0.775,35.225 1.675,35.225 R34.2 R33.1 ; Q4.2 3.05,13.25 3.05,12.5 R47.2 3.125,12.375 3.125,11.825 v1(3.1,11.8) ; Q5.2 5.85,13.25 5.85,12.5 R48.2 5.9,12.35 v1(5.9,11.8) ; v1(10.5,11.8) 11.15,11.8 R45.2 ; C33.2@11,14.86 11.16,14.86 v1(11.6,15.3) 11.639,15.339 11.639,15.41 11.879,15.65 U7.12 ; R41.2@41.975,20.275 42,20.3 v1(42,21)
  Layer 3 w0.508: v1(11.6,15.3) 10.5,14.2 v1(10.5,11.8) 10.5,9.775 14.55,5.725 26.125,5.725 34.3,13.9 34.3,20.2 37,22.9 40.1,22.9 v1(42,21)
  Layer 4 w0.508: v1(0.75,35.2) 0.75,14.15 v1(3.1,11.8) v1(5.9,11.8) v1(10.5,11.8)
+5V: C6.1 C7.1 C8.1 C9.2 C10.2 C13.1 C29.2 C30.2 C31.2 C32.2 C34.2 Q1.1 R21.1 R23.2 R35.2 R46.2 R49.2 R50.2 R55.2 R56.2 R57.2 U1.7 U2.7 U3.2 U7.3 U7.4 U8.6 U8.7 | length 33.3
  Layer 1 w0.254: v1(1.5,17.6) R56.2 ; v1(1.5,19.4) R57.2 ; v1(2,16.2) R49.2 ; v1(4.2,35.3) 4.86,35.3 C13.1 6.86,35.34 7.2,35 U3.2 ; U8.7 4.988,22.037 4.988,23.388 v1(5,23.4) C34.2 5.633,23.393 5.633,22.032 U8.6 ; R50.2 v1(7.9,16.2) ; R21.1 v1(9.7,38.3) ; v1(11.3,30.3) C10.2 ; v1(11.3,31.3) C9.2 ; v1(11.3,32.3) C8.1 C9.2 ; Q1.1 11.94,28.96 C10.2 ; v1(12.2,21) 12.2,20.945 12.241,20.904 12.241,20.509 R46.2 R46.2@12.4,20.362 ; v1(13.7,35.2) 14.35,35.2 R23.2 ; U7.3 16.892,16.65 C29.2@17.182,16.94 ; U7.4 16.972,17.15 C29.2@17.182,16.94 ; R55.2 v1(17.1,13.3) ; v1(18,21.7) 18.039,21.661 18.479,21.661 C7.1 ; v1(18.2,13.9) 18.22,13.92 18.22,14.58 C31.2 18.22,14.62 C32.2@18.22,15.62 ; C32.2 C32.2@18.22,15.62 ; C7.1@18.6,21.34 20.44,21.34 21.265,22.165 U1.7 ; v1(18.9,17.2) 18.64,16.94 C30.2 ; U2.7 27.862,22.527 27.862,23.998 C6.1 v1(28.5,24) ; v1(37.6,24.7) 38.15,24.7 R35.2 ; v1(38.2,25.3) R35.2 ; v1(38.8,24.7) 38.25,24.7 R35.2 ; C10.2 C9.2 ; C29.2@17.182,16.94 C29.2 C30.2 ; C30.2 v1(18.2,16.3) 18.22,16.28 C32.2@18.22,15.62
+5V5: C22.2 C24.2 C28.2 J2.29 U5.3 U5.5 U5.6 U5.9 U6.1 U6.6 | length 16.5
  Layer 1 w0.2: J2.29 v1(20.4,3) ; U5.5 35.517,18.9 35.5,18.883 ; U5.3 35.8,19.7 35.5,19.4 35.5,18.883 ; v1(38.2,17.3) v1@38.18,17.32 ; U5.6 38.205,18.9 38.205,18.045 C28.2 38.18,17.98 v1@38.18,17.32 ; U5.9 39.128,20.1 39.368,20.34 C22.2 ; v1(40.1,20.1) 39.64,20.1 C22.2 ; v1(40.1,20.7) 40.03,20.7 39.83,20.5 39.56,20.5 C22.2 ; 35.5,18.883 35.5,17.8 36.017,17.283 38.143,17.283 v1@38.18,17.32
  Layer 1 w0.254: v1(37.9,11.5) 37.9,11.555 38.048,11.703 38.048,12.048 U6.6 ; U6.1 39.05,13.829 39.052,13.827 40.098,13.827 C24.2 ; v1(41.2,13.2) 41,13.4 40.525,13.4 C24.2 ; v1(41.2,14.1) 41.145,14.1 41,13.955 40.63,13.955 C24.2
+VUSB: D2.1 J2.27 K1.1 | length 40
  Layer 1 w0.254: J2.27 v1(18.8,4.9) ; v1(26.9,25.5) D2.1 27.645,28.733 27.378,29 K1.1
  Layer 4 w0.254: v1(18.8,4.9) 25.3,4.9 31,10.6 31,22.7 28.2,25.5 v1(26.9,25.5)
-5V: C11.1 C12.1 R19.2 R38.2 U1.4 | length 13.7
  Layer 1 w0.254: U1.4 23.871,17.009 23.871,15.769 C11.1 C12.1 24.045,14.595 24.045,13.605 R19.2 R38.2
DC_CPL_EN: J2.21 U4.1 | length 42.8
  Layer 1 w0.254: J2.21 v1(14,2.988) ; v1(29.1,29) 29.33,29.23 U4.1
  Layer 4 w0.254: v1(14,2.988) 15.212,4.2 25.3,4.2 31.5,10.4 31.5,22.9 29.1,25.3 v1(29.1,29)
GND: C2.1 C3.1 C6.2 C7.2 C8.2 C9.1 C10.1 C11.2 C12.2 C13.2 C15.1 C17.2 C18.1 C19.1 C20.1 C21.1 C22.1 C23.1 C24.1 C26.1 C27.1 C28.1 C29.1 C30.1 C31.1 C32.1 C33.1 C34.1 D1.2 D1.3 GDT1.2 J1.2 J2.1 J2.4 J2.6 J2.9 J2.11 J2.12 J2.13 J2.14 J2.15 J2.26 J2.28 J2.30 J2.32 J2.33 J2.34 J2.35 J2.37 J2.38 J2.39 J2.40 J2.SHLD MH1.1 MH2.1 MH3.1 MH4.1 NTC1.2 Q3.3 R6.2 R10.1 R11.1 R13.1 R16.2 R20.1 R22.2 R29.1 R31.1 R32.1 R39.1 R42.1 R44.1 R53.1 R58.1 R59.1 R60.1 TP1.1 U2.4 U3.5 U5.2 U5.4 U5.11 U6.2 U6.9 U7.5 U7.8 U7.17 U8.5 | length 117.7
  Layer 1 w0.2: U5.4 36.95,19.3 U5.11@37.3,19.65 ; U5.2 37.24,20.1 37.24,19.79 37.3,19.85 v1(37.3,20.103) ; v1(37.3,19.3) U5.11@37.3,19.65 ; U5.11 U5.11@37.3,19.65
  Layer 1 w0.254: v1(1.5,18.5) R59.1 ; v1(1.5,20.3) R60.1 ; v1(4.2,36.4) 4.76,36.4 C13.2 4.93,36.23 6.17,36.23 v1(6.2,36.2) 6.225,36.225 6.225,37.025 U3.5 R22.2 v1(5.6,38.3) ; U8.5 6.275,23.097 6.56,23.382 C34.1 v1(7.2,23.4) ; v1(10.9,17.9) R53.1 ; C33.1 11.04,13.8 v1(11.609,13.8) ; C3.1 11.78,22.28 v1(11.78,21.62) ; C10.1 v1(13.5,30.3) ; C9.1 v1(13.5,31.3) ; C8.2 v1(13.5,32.3) ; v1(13.3,15.6) v1(14.1,16.4) ; U7.8 v1(13.35,17.15) v1(14.1,16.4) ; D1.3 14.375,30.925 14.975,30.925 v1(15,30.9) ; D1.2 14.95,32.25 v1(15,32.2) ; v1(14.4,21.4) R10.1 R11.1 v1(14.4,22.3) ; v1(14.7,33.4) 14.725,33.425 15.375,33.425 NTC1.2 ; U7.5 v1(14.85,17.15) v1(14.1,16.4) ; v1(14.9,15.6) v1(14.1,16.4) ; R58.1 v1(17.1,12.4) ; v1(16.5,17.9) 16.52,17.88 17.18,17.88 C29.1 ; R16.2 16.725,24.725 17.375,24.725 v1(17.4,24.7) ; v1(17.1,36.7) 17.1,36.225 C17.2 17.838,36.163 17.8,36.2 17.9,36.3 v1(17.9,36.7) ; v1(17.9,18.8) 17.86,18.84 C2.1 C29.1 ; J2.26 v1(18,3) ; v1(18,6.5) J2.15 ; v1(18,22.5) 18.56,22.5 C7.2 ; R6.2 v1(19,27.6) ; v1(18.8,6.5) J2.14 ; v1(18.9,18.2) 18.54,18.2 18.22,17.88 C30.1 C29.1 ; v1(19,26.7) R29.1 ; v1(19.1,13.9) 19.16,13.96 C31.1 C31.1@19.175,14.615 ; C32.1@19.15,15.6 C32.1@19.16,15.59 ; C32.1 19.2,15.64 v1(19.2,16.3) ; C32.1@19.175,15.575 C31.1@19.175,14.615 ; C31.1@19.185,14.625 C31.1@19.175,14.615 ; C20.1 19.561,24.679 19.561,24.239 v1(19.6,24.2) ; J2.28 v1(19.6,3) ; v1(19.6,6.5) J2.13 ; v1(20.4,6.5) J2.12 ; v1(20.4,24.2) C18.1 ; v1(20.6,13.6) R13.1 ; J2.30 v1(21.2,3) ; v1(21.2,6.5) J2.11 ; v1(21.2,12.9) 21.225,12.925 21.225,13.575 R13.1 ; v1(21.2,24.2) 21.2,24.64 C19.1 ; R20.1 R13.1 ; J2.32 v1(22.8,3) ; v1(22.8,6.5) J2.9 ; J2.33 v1(23.6,3) ; J2.34 v1(24.4,3) ; C11.2@24.98,15.5 v1(25.7,15.5) ; C11.2@24.98,15.62 C11.2 ; v1(25,16.3) 24.96,16.26 C11.2 ; J2.35 v1(25.2,3) ; v1(25.2,6.5) J2.6 ; v1(25.7,14.5) 24.96,14.5 C12.2 C11.2 ; v1(26.3,23.8) 26.74,23.8 C6.2 26.94,24.56 v1(26.9,24.6) ; J2.37 v1(26.8,3) ; J2.4 v1(26.8,9.3) ; J2.38 v1(27.6,3) ; J2.39 v1(28.4,3) ; v1(28.8,9.4) 28.8,9.25 29.2,8.85 J2.1 ; v1(29,37.1) 29.055,37.1 29.175,37.22 29.595,37.22 C15.1 29.595,37.78 29.175,37.78 29.055,37.9 v1(29,37.9) ; J2.40 v1(29.2,3) ; v1(30.2,29.2) 30.2,28.572 30.261,28.511 R32.1 31.2,28.45 R31.1 31.1,28.65 v1(31.1,29.2) ; v1(30.3,26.2) 30.7,26.2 Q3.3 30.85,26.285 31.296,25.839 31.361,25.839 v1(31.4,25.8) ; v1(30.4,16) 30.405,16.005 U2.4 30.402,17.077 30.402,18.198 v1(30.4,18.2) ; v1(35.8,28.3) TP1.1 ; R39.1 C21.1 37.3,21.34 v1(37.3,20.8) v1(37.3,20.103) ; v1(36.3,10) 36.325,10.025 36.875,10.025 R42.1 36.95,10 v1(37.5,10) ; C23.1 36.31,12.175 36.996,12.861 37.061,12.861 v1(37.1,12.9) 38.2,12.9 v1(38.3,13) ; v1(36.6,18) C28.1 37.3,18.06 v1(37.3,18.6) v1(37.3,19.3) ; U5.11 37.24,19.76 37.3,19.82 U5.11@37.3,19.85 ; v1(38.1,27) TP1.1 ; v1(38.1,29.6) TP1.1 ; v1(39,16) 39.013,15.988 39.013,15.212 C27.1 ; v1(39,21.892) 39,21.66 C22.1 39.4,21.278 39.761,21.639 39.761,21.86 v1(39.8,21.899) ; v1(39.8,15.2) C27.1 ; v1(40.3,11.3) C24.1 ; v1(40.4,28.3) TP1.1 ; v1(41,17.5) R44.1 40.375,17.525 40.375,18.415 C26.1 40.42,18.42 40.98,18.42 v1(41,18.4) ; v1(41.1,12.2) 41.087,12.188 40.313,12.188 C24.1 ; v1(38.3,13) 38.55,13.25 U6.2 38.55,14.715 39.025,15.19 C27.1 ; v1(38.3,13) 38.4,12.9 v1(39.5,12.9) 39.539,12.861 39.604,12.861 40.29,12.175 C24.1
  Layer 1 w1.016: J1.2@25.4,47.4 25.4,44.6 26.15,43.85 GDT1.2
  other v1: 12.7,2.16 30.48,2.16 2.54,7.24 5.08,7.24 30.48,7.24 38.1,7.24 40.64,7.24 24.13,9.78 34.29,9.78 39.37,9.78 41.91,9.78 20.32,12.32 22.86,12.32 25.4,12.32 27.94,12.32 30.48,12.32 8.89,14.86 26.67,14.86 29.21,14.86 7.62,17.4 25.4,17.4 33.02,17.4 3.81,19.94 6.35,19.94 29.21,19.94 2.54,22.48 7.62,22.48 25.4,22.48 33.02,22.48 8.89,25.02 34.29,25.02 41.91,25.02 2.54,27.56 5.08,27.56 7.62,27.56 10.16,27.56 33.02,27.56 8.89,30.1 19.05,30.1 26.67,30.1 34.29,30.1 36.83,30.1 39.37,30.1 41.91,30.1 5.08,32.64 17.78,32.64 22.86,32.64 33.02,32.64 35.56,32.64 38.1,32.64 8.89,35.18 11.43,35.18 24.13,35.18 34.29,35.18 36.83,35.18 39.37,35.18 41.91,35.18 2.54,37.72 12.7,37.72 15.24,37.72 17.78,37.72 35.56,37.72 38.1,37.72 3.81,40.26 6.35,40.26 8.89,40.26 11.43,40.26 13.97,40.26 16.51,40.26 19.05,40.26 34.29,40.26 36.83,40.26 39.37,40.26 41.91,40.26 2.54,42.8 5.08,42.8 7.62,42.8 10.16,42.8 12.7,42.8 15.24,42.8 17.78,42.8 20.32,42.8 22.86,42.8 25.4,42.8 33.02,42.8 35.56,42.8 38.1,42.8 6.35,45.34 8.89,45.34 11.43,45.34 13.97,45.34 21.59,45.34 29.21,45.34 31.75,45.34 34.29,45.34 36.83,45.34 41.91,45.34 7.62,47.88 10.16,47.88 12.7,47.88 15.24,47.88 20.32,47.88 22.86,47.88 27.94,47.88 30.48,47.88 33.02,47.88 35.56,47.88
NetC1_1: C1.1 Q1.3 R3.2 | length 3
  Layer 1 w0.254: Q1.3 14.662,27.988 16.188,27.988 C1.1 16.009,27.784 16.009,26.859 R3.2
NetC1_2: C1.2 D1.1 R1.1 R27.1 | length 5.3
  Layer 1 w0.254: R27.1 16.275,33.425 16.275,29.5 C1.2 16.213,29.412 17.438,29.412 R1.1
NetC2_2: C2.2 R4.2 U2.3 | length 15.1
  Layer 1 w0.254: R4.2 15.87,19.78 17.18,19.78 C2.2 17.22,19.78 17.88,19.78 v1(17.9,19.8) ; v1(29.1,18.2) 29.117,18.183 29.117,17.093 U2.3
  Layer 4 w0.254: v1(17.9,19.8) 27.5,19.8 v1(29.1,18.2)
NetC3_2: C3.2 Q2.1 R5.2 | length 4.7
  Layer 1 w0.254: R5.2 10.84,21.41 C3.2 10.84,24.565 11.725,25.45 Q2.1
NetC4_1: C4.1 R9.2 R16.1 | length 2
  Layer 1 w0.254: C4.1 15.82,22.82 15.82,23.83 R9.2 R16.1
NetC4_2: C4.2 R12.2 R14.1 R18.1 U1.2 | length 10
  Layer 1 w0.254: C4.2 16.755,22.795 16.755,21.805 R12.2 20.984,17.566 21.105,17.566 21.257,17.414 21.257,15.607 R18.1 R14.1
NetC5_1: C5.1 R17.2 U2.2 | length 4.8
  Layer 1 w0.254: C5.1 R17.2 26.215,19.15 27.865,17.5 U2.2
NetC5_2: C5.2 R5.1 U2.6 | length 19.4
  Layer 1 w0.254: R5.1 10.925,20.425 11.575,20.425 v1(11.6,20.4) ; v1(24.42,21.08) 25.18,21.08 C5.2 28.095,21.06 29.135,22.1 U2.6
  Layer 4 w0.254: v1(11.6,20.4) 23.7,20.4 24.38,21.08 v1(24.42,21.08)
NetC14_1: C14.1 K1.3 U4.4 | length 4.3
  Layer 1 w0.254: K1.3 29.19,34.4 29.33,34.26 29.33,34.495 29.867,35.032 29.867,35.892 C14.1
NetC14_2: C14.2 C15.2 GDT1.1 J1.1 U4.3 | length 15.2
  Layer 1 w0.254: J1.1 21.725,39.475 29.175,39.475 GDT1.1 31,39.35 31,36.225 C14.2 31.333,35.892 31.333,35.032 31.87,34.495 U4.3
NetC16_1: C16.1 C18.2 C19.2 C20.2 K1.7 R26.2 R28.2 | length 12.2
  Layer 1 w0.254: C20.2 19.42,25.78 22.33,25.78 R26.2 ; K1.7 20.966,32.2 21.233,31.933 21.442,31.933 22.35,31.025 R28.2 R26.2 ; C16.1 22.975,24.61 22.35,25.235 R26.2
NetC16_2: C16.2 K1.2 R24.1 | length 9.3
  Layer 1 w0.254: C16.2 24.425,24.61 24.9,25.085 24.9,25.65 R24.1 24.9,25.95 24.9,31.1 26,32.2 K1.2
NetC17_1: C17.1 K1.6 R27.2 | length 4
  Layer 1 w0.254: R27.2 16.312,34.363 17.488,34.363 C17.1 17.512,34.388 20.268,34.388 K1.6
NetC21_2: C21.2 R35.1 R36.2 U5.10 | length 3.4
  Layer 1 w0.2: R36.2 R36.2@38.155,22.395 ; R35.1 38.155,23.705 R36.2@38.155,22.395 ; U5.10 38.16,20.5 C21.2 38.155,21.405 R36.2@38.155,22.395
NetC23_2: C23.2 R38.1 R40.2 U6.4 | length 5.4
  Layer 1 w0.254: R40.2 R38.1 35.062,13.613 36.287,13.613 C23.2 36.502,13.827 37.548,13.827 37.55,13.829 U6.4
NetC25_1: C25.1 U6.7 | length 1.3
  Layer 1 w0.254: C25.1 38.34,10.818 38.55,11.028 U6.7
NetC25_2: C25.2 U6.8 | length 1.3
  Layer 1 w0.254: U6.8 39.05,11.028 39.26,10.818 C25.2
NetC26_2: C26.2 R41.1 R43.2 U5.8 | length 3.9
  Layer 1 w0.2: U5.8 39.023,19.7 39.373,19.35 R43.2 39.405,19.355 40.395,19.355 C26.2 40.405,19.355 41.995,19.355 R41.1
NetC27_2: C27.2 U6.3 | length 1.4
  Layer 1 w0.254: C27.2 37.575,15.19 38.05,14.715 U6.3
NetD2_2: D2.2 K1.8 Q3.1 | length 13.6
  Layer 1 w0.254: K1.8 20.28,28.22 v1(20.3,28.2) ; v1(28.439,26.8) 28.455,26.8 D2.2 30.515,25.5 31.5,24.515 Q3.1
  Layer 4 w0.254: v1(20.3,28.2) 27.039,28.2 v1(28.439,26.8)
NetD3_2: D3.2 R33.2 | length 2.1
  Layer 1 w0.254: R33.2 2.55,37.15 2.9,36.8 D3.2
NetK1_4: K1.4 K1.5 | length 6.6
  Layer 1 w0.254: K1.5 K1.4
NetNTC1_1: NTC1.1 R23.1 TP3.1 U3.3 | length 12.6
  Layer 1 w0.254: TP3.1 5.985,30.8 8.15,32.965 U3.3 R23.1 NTC1.1
NetQ1_2: Q1.2 Q2.3 R4.1 R8.1 U7.6 | length 11.4
  Layer 1 w0.254: Q1.2 12.75,27.05 13.1,26.7 13.1,24.9 13.5,24.5 Q2.3 14.5,24.5 15.1,23.9 15.1,20.85 R8.1 R4.1 14.35,19.2 U7.6
NetQ2_2: Q2.2 R10.2 R11.2 | length 2.7
  Layer 1 w0.254: Q2.2 12.075,23.55 12.791,22.834 12.791,21.559 R10.2
NetQ3_2: Q3.2 R30.1 | length 1.2
  Layer 1 w0.254: Q3.2 R30.1
NetQ4_1: Q4.1 R49.1 U8.3 | length 4.2
  Layer 1 w0.254: Q4.1 3.55,15.3 R49.1 5.3,16.2 5.619,16.519 5.619,17.569 U8.3
NetQ5_1: Q5.1 R50.1 U8.4 | length 2.4
  Layer 1 w0.254: R50.1@6.275,16.275 R50.1@6.313,16.237 ; U8.4 6.313,17.538 R50.1@6.313,16.237 ; Q5.1 6.35,15.3 R50.1 R50.1@6.313,16.237
NetR1_2: R1.2 R2.1 | length 0.9
  Layer 1 w0.254: R2.1 R1.2
NetR2_2: R2.2 R6.1 U1.3 | length 13.5
  Layer 1 w0.254: R2.2 17.6,28.35 v1(17.6,26.7) ; v1(21.1,21) 22.535,19.565 U1.3
  Layer 4 w0.254: v1(17.6,26.7) 17.6,25.3 21.1,21.8 v1(21.1,21)
NetR3_1: R3.1 R7.1 R17.1 U1.6 | length 14
  Layer 1 w0.254: R7.1@16.75,25.7 17.2,25.7 19.3,23.6 21.885,23.6 22.535,22.95 U1.6 22.535,20.365 24.619,18.281 25.169,18.281 R17.1 ; R7.1 R3.1
NetR7_2: R7.2 R9.1 | length 1.1
  Layer 1 w0.254: R9.1 15.825,24.775 15.825,25.775 R7.2
NetR8_2: R8.2 R12.1 | length 1.1
  Layer 1 w0.254: R8.2 R12.1
NetR13_2: R13.2 R15.2 R19.1 | length 2
  Layer 1 w0.254: R15.2 R13.2 R19.1
NetR14_2: R14.2 R15.1 | length 1
  Layer 1 w0.254: R15.1 R14.2
NetR18_2: R18.2 R20.2 | length 1
  Layer 1 w0.254: R20.2 R18.2
NetR21_2: R21.2 R22.1 U3.4 | length 2.3
  Layer 1 w0.254: R22.1 R21.2 U3.4
NetR24_2: R24.2 R25.1 | length 0.9
  Layer 1 w0.254: R24.2 R25.1
NetR25_2: R25.2 R26.1 | length 0.9
  Layer 1 w0.254: R26.1 R25.2
NetR28_1: R28.1 R29.2 | length 0.9
  Layer 1 w0.254: R29.2 R28.1
NetR31_2: R31.2 U4.2 | length 1.8
  Layer 1 w0.254: U4.2 32.01,30.035 32.01,28.64 R31.2
NetR36_1: R36.1 R37.1 | length 1
  Layer 1 w0.2: R37.1 R36.1
NetR37_2: R37.2 R39.2 U5.1 | length 2.7
  Layer 1 w0.2: R37.2 R39.2 35.35,20.85 35.7,20.5 U5.1
NetR40_1: R40.1 R42.2 U6.5 | length 2.3
  Layer 1 w0.254: R40.1 35.975,10.925 36.875,10.925 R42.2 37.059,11.109 37.059,11.438 37.55,11.929 U6.5
NetR43_1: R43.1 R44.2 U5.7 | length 2.8
  Layer 1 w0.2: U5.7 38.6,19.3 38.8,19.1 38.8,18.6 38.95,18.45 R43.1 39.425,18.425 39.425,17.525 R44.2
NetR46_1: R46.1 R52.1 R53.2 TP2.1 U7.7 | length 13.7
  Layer 1 w0.254: TP2.1 5.983,25.8 8.5,23.283 R52.1 9.05,20.75 10.35,19.45 R53.2 R46.1 13.55,19.45 13.85,19.15 U7.7
NetR51_1: R51.1 R52.2 | length 0.9
  Layer 1 w0.254: R51.1 R52.2
NetR51_2: R51.2 U8.8 | length 4.4
  Layer 1 w0.254: U8.8 4.325,21.075 4.65,20.75 R51.2
NetR54_1: R54.1 U7.1 | length 1.4
  Layer 1 w0.254: U7.1 16.321,15.65 16.762,15.209 17.041,15.209 R54.1
NetR54_2: R54.2 U7.2 | length 1.3
  Layer 1 w0.254: U7.2 16.988,16.15 17.188,15.95 R54.2
NetR55_1: R55.1 R58.2 U7.16 | length 2.4
  Layer 1 w0.254: U7.16 14.85,14 R55.1 R58.2
NetR56_1: R56.1 R59.2 U8.1 | length 2.2
  Layer 1 w0.254: R59.2 R56.1 4.3,17.6 U8.1
NetR57_1: R57.1 R60.2 U8.2 | length 4.2
  Layer 1 w0.254: R60.2 R57.1 4.2,19.4 4.969,18.631 4.969,17.581 U8.2
OUT_N: J2.8 U7.14 | length 14.4
  Layer 1 w0.153: U7.14 13.85,12.35 15.38,10.82 21.984,10.82 23.6,9.204 J2.8
OUT_P: J2.7 U7.15 | length 14.6
  Layer 1 w0.153: U7.15 14.35,12.25 15.5,11.1 22.1,11.1 24.4,8.8 J2.7
PGA_CSn: J2.18 R45.1 U7.9 | length 12.7
  Layer 1 w0.254: v1(11.5,17.5) 11.85,17.15 U7.9 U7.9 ; v1(12.4,14.4) 12.375,14.375 12.375,12.125 R45.1 12.35,11.05 13.1,10.3 14.1,10.3 15.6,8.8 J2.18
  Layer 4 w0.254: v1(11.5,17.5) 12.4,16.6 v1(12.4,14.4)
PGA_SCLK: J2.16 U7.11 | length 13.1
  Layer 1 w0.254: v1(11.4,16.1) 11.455,16.1 11.503,16.148 12.173,16.148 U7.11 ; J2.16 v1(17.2,9.3)
  Layer 4 w0.254: v1(11.4,16.1) 11,15.7 11,13 14.2,9.8 16.7,9.8 v1(17.2,9.3)
PGA_SDIO: J2.17 U7.10 | length 14.3
  Layer 1 w0.254: v1(11.4,16.8) 11.455,16.8 11.603,16.652 12.173,16.652 U7.10 ; J2.17 v1(16.4,9.3)
  Layer 4 w0.254: v1(11.4,16.8) 11.361,16.761 10.961,16.761 10.5,16.3 10.5,12.6 13.8,9.3 v1(16.4,9.3)
THERMn: D3.1 J2.24 R34.1 U3.1 | length 49.5
  Layer 1 w0.254: R34.1 1.712,34.362 D3.1@2.887,34.362 ; v1(5,9.2) 4.3,9.2 0.7,12.8 0.7,31.5 2.8,33.6 2.8,34.275 D3.1@2.887,34.362 ; U3.1@6.238,34.15 U3.1@6.238,34.362 ; U3.1 U3.1@6.238,34.362 ; J2.24 v1(16.4,4.9) ; D3.1@2.887,34.362 D3.1 2.912,34.362 U3.1@6.238,34.362
  Layer 4 w0.254: v1(5,9.2) 11,9.2 15.3,4.9 v1(16.4,4.9)
TRIMDAC_SCL: J2.20 Q4.3 R47.1 | length 13.3
  Layer 1 w0.254: Q4.3 4.15,13.25 4.15,12.5 R47.1 7.25,9.2 13.5,9.2 14,8.7 J2.20
TRIMDAC_SDA: J2.19 Q5.3 R48.1 | length 12.2
  Layer 1 w0.254: Q5.3 6.95,13.25 6.95,12.5 R48.1 6.85,10.95 8.1,9.7 13.9,9.7 14.8,8.8 J2.19
VCM: J2.10 U7.13 | length 13.3
  Layer 1 w0.254: U7.13 13.35,11.95 15.1,10.2 20.6,10.2 22,8.8 J2.10
pads on no net: J2.2 J2.3 J2.5 J2.22 J2.25 J2.31 J2.36 U1.1 U1.5 U1.8 U2.1 U2.5 U2.8

## Polygon pours and split planes (outlines as drawn)
GND on Layer 2 "Layer 2-No Net" (solid, pour order 0): 0.5,51.5 42.7,51.5 42.7,0.5 0.5,0.5
+5V on Layer 4 "+5V_L04_P006" (solid, remove dead copper, pour order 6): 0.5,51.5 42.7,51.5 42.7,0.5 0.5,0.5
GND on Layer 3 "Layer 3-No Net" (solid, pour order 10): 0.5,51.5 42.7,51.5 42.7,0.5 0.5,0.5
+5V5 on Layer 3 "Layer 3-No Net 1" (solid, pour order 8): 13.8,0.5 13.8,5.8 26.1,5.8 34.3,14 34.3,20.2 34.4,20.2 37.1,22.9 40.1,22.9 42,21 42.7,21 42.7,0.5

## Keep-outs
Layer 2:
  region: 15.9,35 15.9,30.1 16.7,30.1 16.7,35
  region: 15.6,28.6 15.6,30.1 16.8,30.1 16.8,29.8 17.9,29.8 17.9,29 16.8,29 16.8,28.6
  region: 16.3,26.3 15.4,26.3 15.4,27.6 14.1,27.6 14.1,28.6 16.8,28.6 16.8,27.2 16.3,27.2
  region: 28.9,36.5 28.9,33.2 30.6,33.2 30.6,36.5
  region: 30.6,38.5 30.6,33.2 32.3,33.2 32.3,38.5
  region: 20.5,40.7 32.3,40.7 32.3,38.5 20.5,38.5
  region: 16.7,35 21.7,35 21.7,33.8 16.7,33.8
  region: 25.5,34.9 28.9,34.9 28.9,33.9 25.5,33.9
  region: 18.9,37.1 28.3,37.1 28.3,36.1 18.9,36.1
  region: 21.9,24 25.5,24 25.5,27.1 20.1,27.1 20.1,26.2 18.9,26.2 18.9,25.3 21.9,25.3
  region: 18.9,32.7 21.7,32.7 21.7,31.7 18.9,31.7
  region: 28.3,32.7 28.3,31.7 25.5,31.7 25.5,32.7
  lines w0.254: 21.35,32 21.375,32 22.35,31.025 22.35,27.025 ; 24.9,27 24.9,31.1 25.8,32 ; 25.8,32 25.8,32
Layer 3:
  lines w0.508: 42,21 42.9,21

## Silkscreen, mask and mechanical layers (free items; w line width, h text height)
Top Overlay:
  text "Front End Rev.1 / Aleksa Bjelogrlic" at 42.719,30.4 h1.5 r90
Mechanical 1:
  the board outline again, w0.05